# EAGLE board Led_Driver_180_LEDs_rev_1 (EAGLE 6.4), part 1 of 3
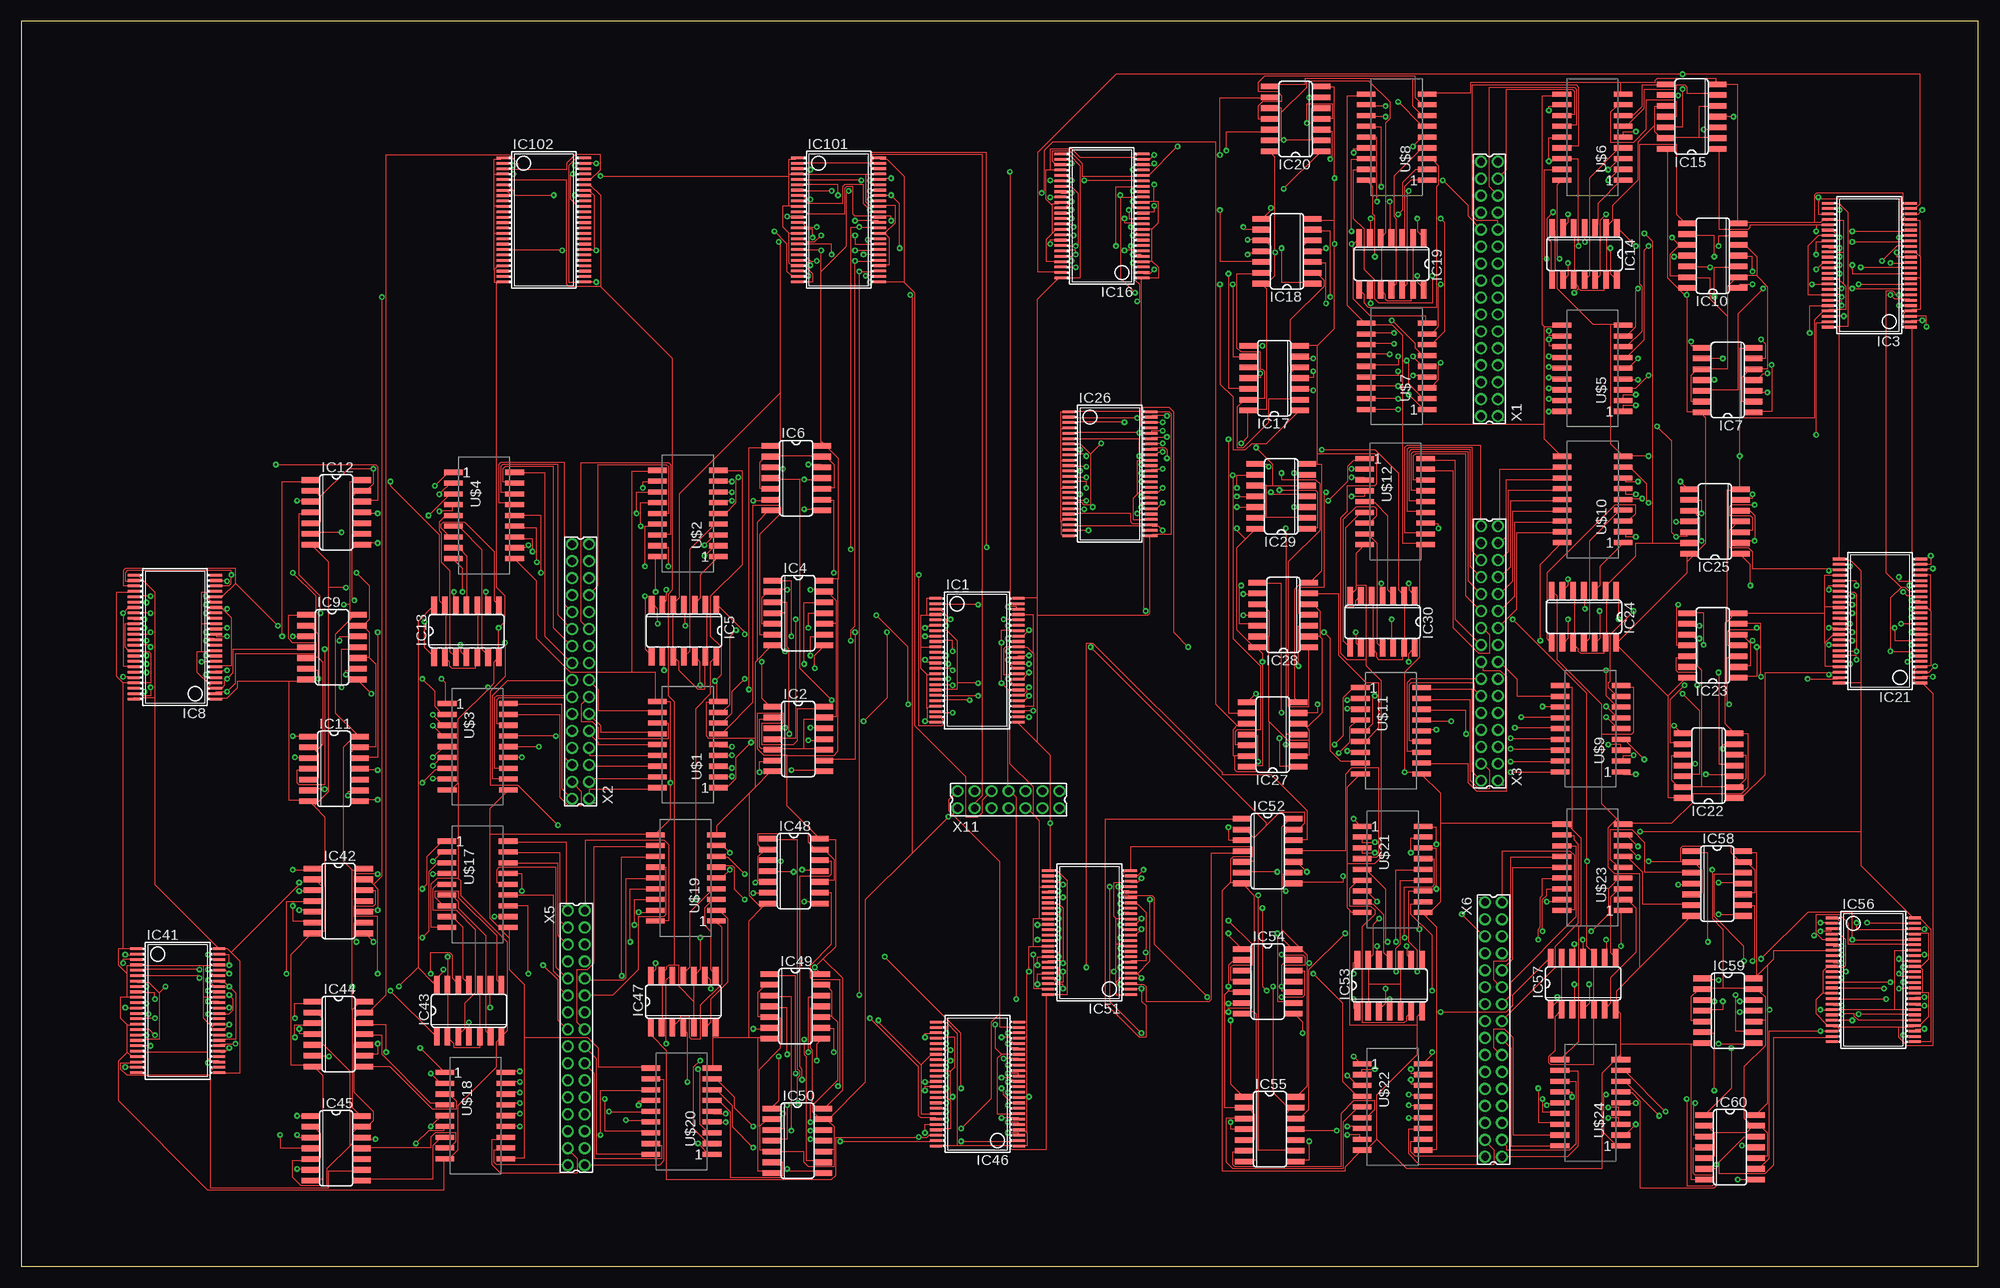
[diagram p0: board, top side]
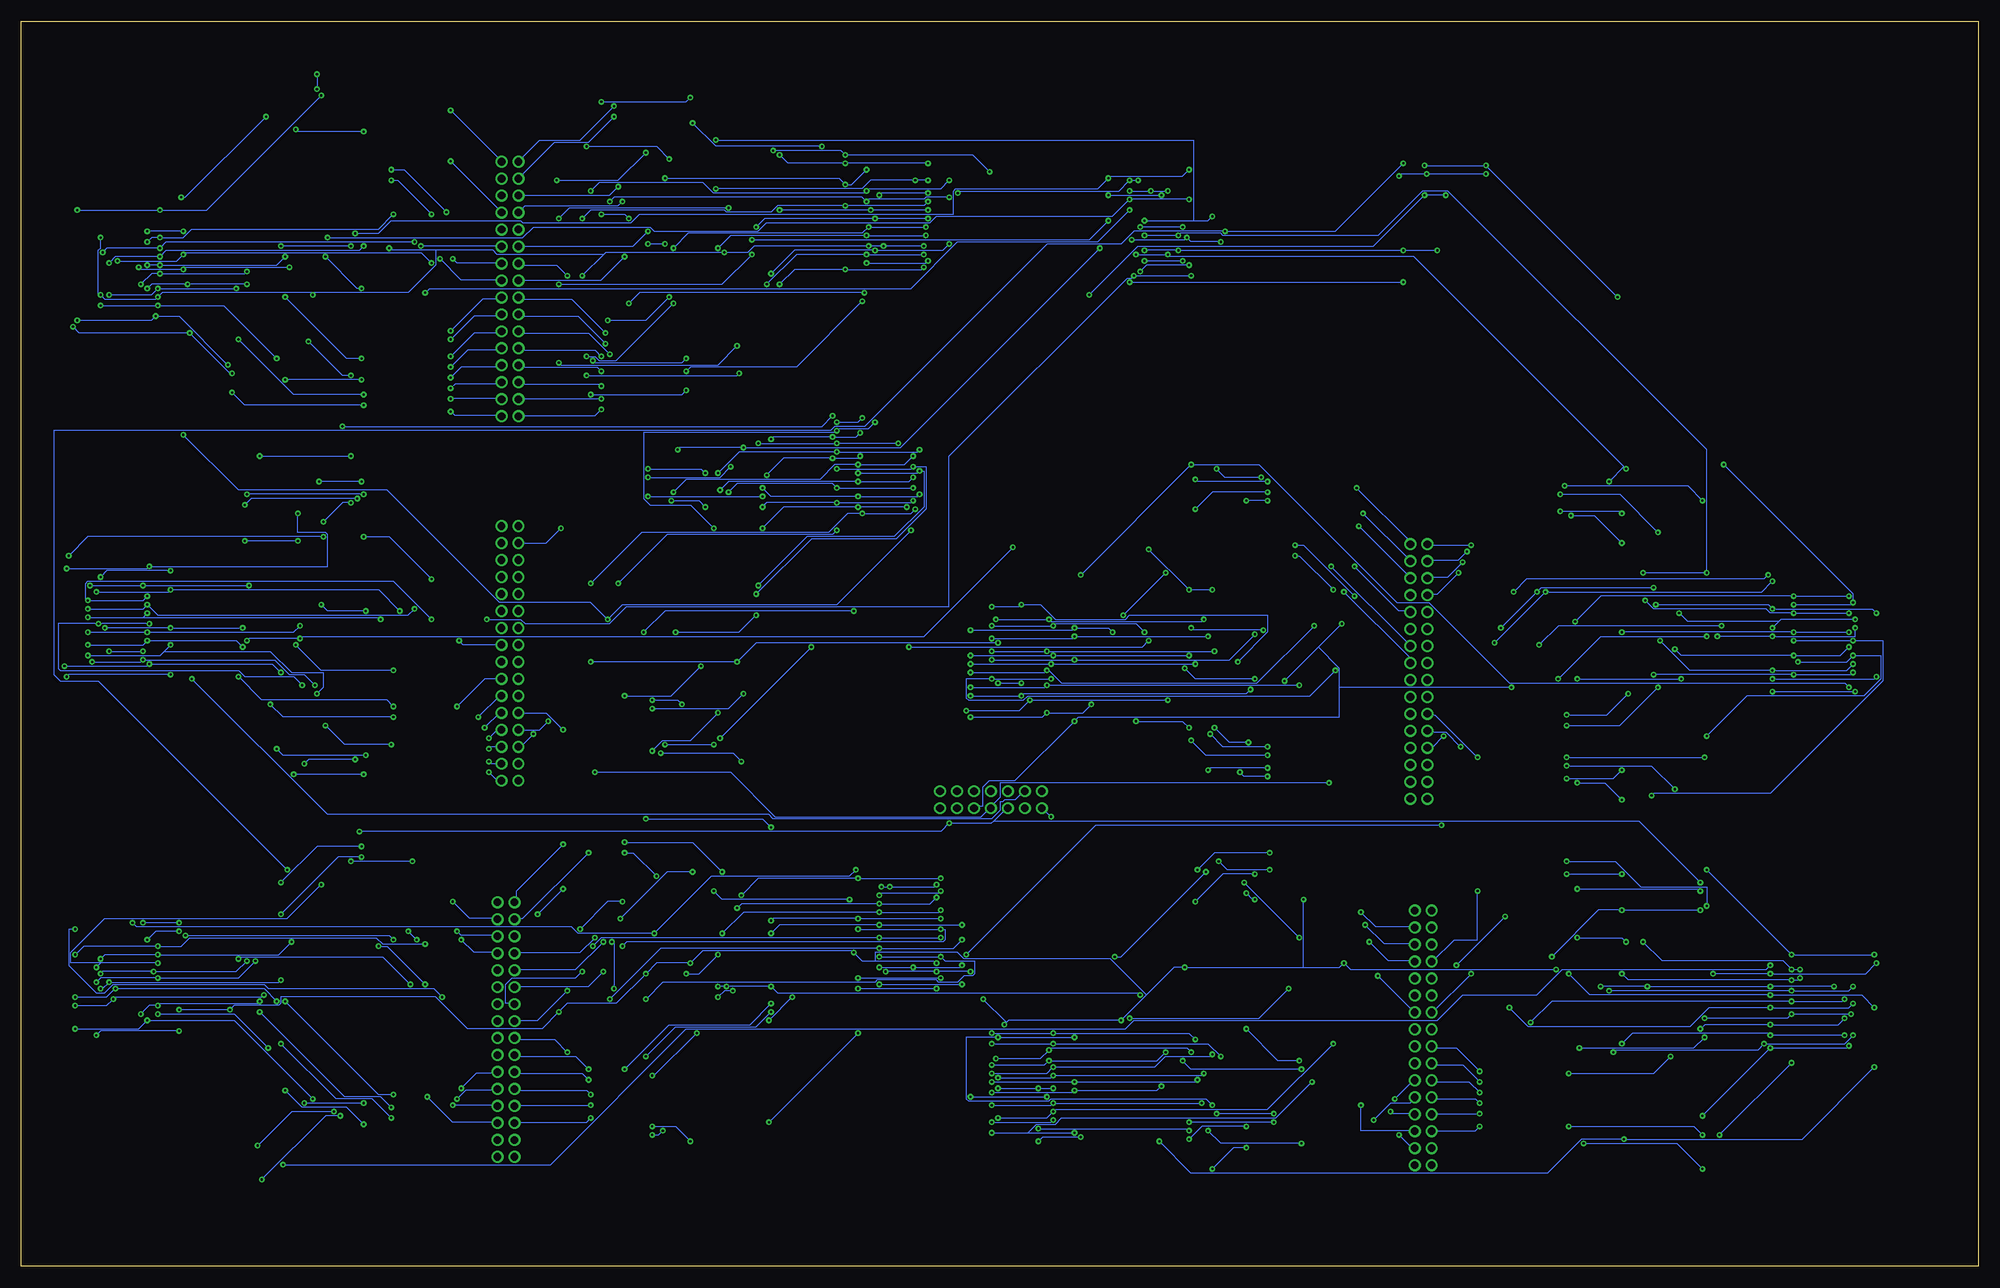
[diagram p1: board, bottom side, seen from below]

Size 230.6 x 146.75 mm. Coordinates in mm from the lower left corner, seen from the top.
Outline: 0,0 230.6,0 230.6,146.75 0,146.75 0,0
Copper layers (1*16): Top 0.035mm / dielectric 1.5mm / Bottom 0.035mm
Design rules "myRules": minimum track width 5mil, minimum drill 10mil, track to track 4mil, track to pad 4mil, pad to pad 4mil, via to via 4mil, smd to smd 4mil, copper to edge 40mil, drill to drill 5mil, minimum pad ring 10mil, minimum via ring 8mil, stop-mask expansion 4mil, vias tented up to drill 0mil, thermal gap 10mil

## Footprints (pad centres in the part's own frame; a part is rotated, then mirrored left to right if it is on the bottom)
SSOP48DL = smd 0.305 x 1.422: 1 -6.985,-4.877; 2 -6.35,-4.877; 3 -5.715,-4.877; 4 -5.08,-4.877; 5 -4.445,-4.877; 6 -3.81,-4.877; 7 -3.175,-4.877; 8 -2.54,-4.877; 9 -1.905,-4.877; 10 -1.27,-4.877; 11 -0.635,-4.877; 12 0,-4.877; 13 0.635,-4.877; 14 1.27,-4.877; 15 1.905,-4.877; 16 2.54,-4.877; 17 3.175,-4.877; 18 3.81,-4.877; 19 4.445,-4.877; 20 5.08,-4.877; 21 5.715,-4.877; 22 6.35,-4.877; 23 6.985,-4.877; 24 7.62,-4.877; 25 7.62,4.877; 26 6.985,4.877; 27 6.35,4.877; 28 5.715,4.877; 29 5.08,4.877; 30 4.445,4.877; 31 3.81,4.877; 32 3.175,4.877; 33 2.54,4.877; 34 1.905,4.877; 35 1.27,4.877; 36 0.635,4.877; 37 0,4.877; 38 -0.635,4.877; 39 -1.27,4.877; 40 -1.905,4.877; 41 -2.54,4.877; 42 -3.175,4.877; 43 -3.81,4.877; 44 -4.445,4.877; 45 -5.08,4.877; 46 -5.715,4.877; 47 -6.35,4.877; 48 -6.985,4.877
SO14 = smd 0.66 x 2.032: 1 -3.81,-3.073; 2 -2.54,-3.073; 3 -1.27,-3.073; 4 0,-3.073; 5 1.27,-3.073; 6 2.54,-3.073; 7 3.81,-3.073; 8 3.81,3.073; 9 2.54,3.073; 10 1.27,3.073; 11 0,3.073; 12 -1.27,3.073; 13 -2.54,3.073; 14 -3.81,3.073
SOP-18 = smd 0.6 x 2.2: 1 -5.08,-3.6; 2 -3.81,-3.6; 3 -2.54,-3.6; 4 -1.27,-3.6; 5 0,-3.6; 6 1.27,-3.6; 7 2.54,-3.6; 8 3.81,-3.6; 9 5.08,-3.6; 10 5.08,3.6; 11 3.81,3.6; 12 2.54,3.6; 13 1.27,3.6; 14 0,3.6; 15 -1.27,3.6; 16 -2.54,3.6; 17 -3.81,3.6; 18 -5.08,3.6
87758-3216 = drill 0.9 pad 1.27: 1 -15,-1; 2 -15,1; 3 -13,-1; 4 -13,1; 5 -11,-1; 6 -11,1; 7 -9,-1; 8 -9,1; 9 -7,-1; 10 -7,1; 11 -5,-1; 12 -5,1; 13 -3,-1; 14 -3,1; 15 -1,-1; 16 -1,1; 17 1,-1; 18 1,1; 19 3,-1; 20 3,1; 21 5,-1; 22 5,1; 23 7,-1; 24 7,1; 25 9,-1; 26 9,1; 27 11,-1; 28 11,1; 29 13,-1; 30 13,1; 31 15,-1; 32 15,1
87758-1416 = drill 0.9 pad 1.27: 1 -6,-1; 2 -6,1; 3 -4,-1; 4 -4,1; 5 -2,-1; 6 -2,1; 7 0,-1; 8 0,1; 9 2,-1; 10 2,1; 11 4,-1; 12 4,1; 13 6,-1; 14 6,1

## Placement (x,y rotation side)
IC1  74AC16374  [SSOP48DL]  112.62,71.75 270 top
IC2  74S08D  [SO14]  91.56,62.16 270 top
IC3  74AC16374  [SSOP48DL]  217.75,117.68 90 top
IC4  74S08D  [SO14]  91.56,77 270 top
IC5  74S08D  [SO14]  78.09,74.94 180 top
IC6  74S08D  [SO14]  91.31,92.91 270 top
IC7  74S08D  [SO14]  201.07,104.46 90 top
IC8  74AC16374  [SSOP48DL]  18.12,73.85 90 top
IC9  74S08D  [SO14]  36.62,72.98 270 top
IC10  74S08D  [SO14]  199.32,119.12 90 top
IC11  74S08D  [SO14]  36.87,58.64 270 top
IC12  74S08D  [SO14]  37.12,88.87 270 top
IC13  74S08D  [SO14]  52.47,74.87 0 top
IC14  74S08D  [SO14]  184.2,119.32 180 top
IC15  74S08D  [SO14]  196.82,135.5 90 top
IC16  74AC16374  [SSOP48DL]  127.33,123.49 90 top
IC17  74S08D  [SO14]  147.66,104.69 90 top
IC18  74S08D  [SO14]  149.14,119.64 90 top
IC19  74S08D  [SO14]  161.45,118.16 180 top
IC20  74S08D  [SO14]  150.16,135.23 90 top
IC21  74AC16374  [SSOP48DL]  219.02,75.75 90 top
IC22  74S08D  [SO14]  198.82,59.03 90 top
IC23  74S08D  [SO14]  199.32,73.19 90 top
IC24  74S08D  [SO14]  184.13,76.57 180 top
IC25  74S08D  [SO14]  199.57,87.8 90 top
IC26  74AC16374  [SSOP48DL]  128.27,93.75 270 top
IC27  74S08D  [SO14]  147.47,62.69 90 top
IC28  74S08D  [SO14]  148.72,76.78 90 top
IC29  74S08D  [SO14]  148.47,90.76 90 top
IC30  74S08D  [SO14]  160.4,75.97 180 top
IC41  74AC16374  [SSOP48DL]  18.43,30.46 270 top
IC42  74S08D  [SO14]  37.39,43.07 270 top
IC43  74S08D  [SO14]  52.77,30.14 0 top
IC44  74S08D  [SO14]  37.39,27.39 270 top
IC45  74S08D  [SO14]  37.11,13.93 270 top
IC46  74AC16374  [SSOP48DL]  112.68,21.19 90 top
IC47  74S08D  [SO14]  78,31.21 0 top
IC48  74S08D  [SO14]  91.04,46.59 270 top
IC49  74S08D  [SO14]  91.21,30.66 270 top
IC50  74S08D  [SO14]  91.46,14.82 270 top
IC51  74AC16374  [SSOP48DL]  125.87,39.04 90 top
IC52  74S08D  [SO14]  146.87,48.95 270 top
IC53  74S08D  [SO14]  161.25,33.12 0 top
IC54  74S08D  [SO14]  146.87,33.59 270 top
IC55  74S08D  [SO14]  147.12,16.18 270 top
IC56  74AC16374  [SSOP48DL]  218.23,34.1 270 top
IC57  74S08D  [SO14]  184.04,33.34 0 top
IC58  74S08D  [SO14]  199.84,45.12 270 top
IC59  74S08D  [SO14]  201.09,30.14 270 top
IC60  74S08D  [SO14]  201.34,14.05 270 top
IC101  74AC16374  [SSOP48DL]  96.32,123.66 270 top
IC102  74AC16374  [SSOP48DL]  61.58,123.65 270 top
U$1  ULN2804-SM  [SOP-18]  78.55,61.5 90 top
U$2  ULN2804-SM  [SOP-18]  78.55,88.74 90 top
U$3  ULN2804-SM  [SOP-18]  53.79,61.25 270 top
U$4  ULN2804-SM  [SOP-18]  54.54,88.51 270 top
U$5  ULN2804-SM  [SOP-18]  185.14,105.85 90 top
U$6  ULN2804-SM  [SOP-18]  185.14,133.09 90 top
U$7  ULN2804-SM  [SOP-18]  162.07,106.08 90 top
U$8  ULN2804-SM  [SOP-18]  162.07,133.09 90 top
U$9  ULN2804-SM  [SOP-18]  184.91,63.38 90 top
U$10  ULN2804-SM  [SOP-18]  185.16,90.39 90 top
U$11  ULN2804-SM  [SOP-18]  161.4,63.13 270 top
U$12  ULN2804-SM  [SOP-18]  161.9,90.14 270 top
U$17  ULN2804-SM  [SOP-18]  53.77,45.04 270 top
U$18  ULN2804-SM  [SOP-18]  53.52,17.78 270 top
U$19  ULN2804-SM  [SOP-18]  78.3,45.79 90 top
U$20  ULN2804-SM  [SOP-18]  77.8,18.3 90 top
U$21  ULN2804-SM  [SOP-18]  161.59,46.79 270 top
U$22  ULN2804-SM  [SOP-18]  161.59,18.8 270 top
U$23  ULN2804-SM  [SOP-18]  185.14,47.04 90 top
U$24  ULN2804-SM  [SOP-18]  184.89,19.3 90 top
X1  87758-3216  [87758-3216]  173,115.2 90 top
X2  87758-3216  [87758-3216]  65.91,70.12 90 top
X3  87758-3216  [87758-3216]  173.02,72.25 90 top
X5  87758-3216  [87758-3216]  65.41,26.94 270 top
X6  87758-3216  [87758-3216]  173.48,27.92 270 top
X11  87758-1416  [87758-1416]  116.34,55.01 0 top

## Library data of the parts
IC1 IC3 IC8 IC16 IC21 IC26 IC41 IC46 IC51 IC56 IC101 IC102 = 74ac-logic
IC2 IC4-IC7 IC9-IC15 IC17-IC20 IC22-IC25 IC27-IC30 IC42-IC45 IC47-IC50 IC52-IC55 IC57-IC60 = 74xx-us
U$1-U$12 U$17-U$24 = fairchild-semic
X1-X3 X5 X6 = con-molex; MPN: 87758-3216; OC_FARNELL: unknown; OC_NEWARK: 25M5684
X11 = con-molex; MF: MOLEX; MPN: 87758-1416; OC_FARNELL: 7472358; OC_NEWARK: 59J1562

## Nets
GND: IC1.1 IC1.4 IC1.10 IC1.15 IC1.21 IC1.24 IC1.28 IC1.34 IC1.39 IC1.45 IC2.7 IC3.1 IC3.4 IC3.10 IC3.15 IC3.21 IC3.24 IC3.28 IC3.34 IC3.39 IC3.45 IC4.7 IC5.7 IC6.7 IC7.7 IC8.1 IC8.4 IC8.10 IC8.15 IC8.21 IC8.24 IC8.28 IC8.34 IC8.39 IC8.45 IC9.7 IC10.7 IC11.7 IC12.7 IC13.7 IC14.7 IC15.7 IC16.1 IC16.4 IC16.10 IC16.15 IC16.21 IC16.24 IC16.28 IC16.34 IC16.39 IC16.45 IC17.7 IC18.7 IC19.7 IC20.7 IC21.1 IC21.4 IC21.10 IC21.15 IC21.21 IC21.24 IC21.28 IC21.34 IC21.39 IC21.45 IC22.7 IC23.7 IC24.7 IC25.7 IC26.1 IC26.4 IC26.10 IC26.15 IC26.21 IC26.24 IC26.28 IC26.34 IC26.39 IC26.45 IC27.7 IC28.7 IC29.7 IC30.7 IC41.1 IC41.4 IC41.10 IC41.15 IC41.21 IC41.24 IC41.28 IC41.34 IC41.39 IC41.45 IC42.7 IC43.7 IC44.7 IC45.7 IC46.1 IC46.4 IC46.10 IC46.15 IC46.21 IC46.24 IC46.28 IC46.34 IC46.39 IC46.45 IC47.7 IC48.7 IC49.7 IC50.7 IC51.1 IC51.4 IC51.10 IC51.15 IC51.21 IC51.24 IC51.28 IC51.34 IC51.39 IC51.45 IC52.7 IC53.7 IC54.7 IC55.7 IC56.1 IC56.4 IC56.10 IC56.15 IC56.21 IC56.24 IC56.28 IC56.34 IC56.39 IC56.45 IC57.7 IC58.7 IC59.7 IC60.7 IC101.1 IC101.4 IC101.10 IC101.15 IC101.21 IC101.24 IC101.28 IC101.34 IC101.39 IC101.45 IC102.1 IC102.4 IC102.10 IC102.15 IC102.21 IC102.24 IC102.28 IC102.34 IC102.39 IC102.45 U$1.9 U$2.9 U$3.9 U$4.9 U$5.9 U$6.9 U$7.9 U$8.9 U$9.9 U$10.9 U$11.9 U$12.9 U$17.9 U$18.9 U$19.9 U$20.9 U$21.9 U$22.9 U$23.9 U$24.9 X11.9
N$1: IC46.23 IC50.12 X11.2
N$2: IC1.2 IC1.46 IC2.1
N$3: IC1.3 IC1.44 IC2.4
N$4: IC1.5 IC1.43 IC2.9
N$5: IC1.6 IC1.41 IC2.12
N$6: IC1.8 IC1.40 IC4.1
N$7: IC1.9 IC1.38 IC4.4
N$8: IC1.11 IC1.37 IC4.9
N$9: IC1.12 IC1.36 IC4.12
N$10: IC1.13 IC1.35 IC5.1
N$11: IC1.14 IC1.33 IC5.4
N$12: IC1.16 IC1.32 IC5.9
N$13: IC1.17 IC1.30 IC5.12
N$14: IC1.19 IC1.29 IC6.1
N$15: IC1.20 IC1.27 IC6.4
N$16: IC1.22 IC1.26 IC6.9
N$17: U$1.18 X2.1
N$19: IC2.3 U$1.1
N$20: IC2.6 U$1.2
N$21: IC2.8 U$1.3
N$22: IC2.11 U$1.4
N$23: IC4.3 U$1.5
N$24: IC4.11 U$1.8
N$25: IC4.8 U$1.7
N$26: IC4.6 U$1.6
N$27: IC5.3 U$2.1
N$28: IC5.6 U$2.2
N$29: IC5.8 U$2.3
N$30: IC6.11 U$2.8
N$31: IC6.8 U$2.7
N$32: IC6.6 U$2.6
N$33: IC6.3 U$2.5
N$34: IC5.11 U$2.4
N$35: IC22.2 IC22.5 IC22.10 IC22.13 IC23.2 IC23.5 IC23.10 IC23.13 IC101.2 IC101.46
N$36: IC24.2 IC24.5 IC24.10 IC24.13 IC25.2 IC25.5 IC25.10 IC25.13 IC101.3 IC101.44
N$39: IC8.2 IC8.46 IC9.1
N$40: IC8.3 IC8.44 IC9.4
N$41: IC8.5 IC8.43 IC9.9
N$42: IC8.6 IC8.41 IC9.12
N$43: IC8.8 IC8.40 IC11.1
N$44: IC8.9 IC8.38 IC11.4
N$45: IC8.11 IC8.37 IC11.9
N$46: IC8.12 IC8.36 IC11.12
N$47: IC8.13 IC8.35 IC12.1
N$48: IC8.14 IC8.33 IC12.4
N$49: IC8.16 IC8.32 IC12.9
N$50: IC8.17 IC8.30 IC12.12
N$51: IC8.19 IC8.29 IC13.1
N$52: IC8.20 IC8.27 IC13.4
N$53: IC8.22 IC8.26 IC13.9
N$54: IC8.23 IC13.12 IC51.47
N$56: IC9.3 U$3.1
N$57: IC9.6 U$3.2
N$58: IC9.8 U$3.3
N$59: IC9.11 U$3.4
N$60: IC11.3 U$3.5
N$61: IC11.11 U$3.8
N$62: IC11.8 U$3.7
N$63: IC11.6 U$3.6
N$64: IC12.3 U$4.1
N$65: IC12.6 U$4.2
N$66: IC12.8 U$4.3
N$67: IC13.11 U$4.8
N$68: IC13.8 U$4.7
N$69: IC13.6 U$4.6
N$70: IC13.3 U$4.5
N$71: IC12.11 U$4.4
N$72: IC1.23 IC6.12 IC8.47
N$75: U$1.17 X2.3
N$76: U$1.16 X2.5
N$77: U$1.15 X2.7
N$78: U$1.14 X2.9
N$79: U$1.13 X2.11
N$80: U$1.12 X2.13
N$81: U$1.11 X2.15
N$82: U$2.18 X2.17
N$83: U$2.17 X2.19
N$84: U$2.16 X2.21
N$85: U$2.15 X2.23
N$86: U$2.14 X2.25
N$87: U$2.13 X2.27
N$88: U$2.12 X2.29
N$89: U$2.11 X2.31
N$90: U$4.11 X2.32
N$91: U$4.12 X2.30
N$92: U$4.13 X2.28
N$93: U$4.14 X2.26
N$94: U$4.15 X2.24
N$95: U$4.16 X2.22
N$96: U$4.17 X2.20
N$97: U$4.18 X2.18
N$98: U$3.11 X2.16
N$99: U$3.12 X2.14
N$100: U$3.13 X2.12
N$101: U$3.14 X2.10
N$102: U$3.15 X2.8
N$103: U$3.16 X2.6
N$104: U$3.17 X2.4
N$105: U$3.18 X2.2
N$107: IC3.2 IC3.46 IC7.1
N$108: IC3.3 IC3.44 IC7.4
N$109: IC3.5 IC3.43 IC7.9
N$110: IC3.6 IC3.41 IC7.12
N$111: IC3.8 IC3.40 IC10.1
N$112: IC3.9 IC3.38 IC10.4
N$113: IC3.11 IC3.37 IC10.9
N$114: IC3.12 IC3.36 IC10.12
N$115: IC3.13 IC3.35 IC14.1
N$116: IC3.14 IC3.33 IC14.4
N$117: IC3.16 IC3.32 IC14.9
N$118: IC3.17 IC3.30 IC14.12
N$119: IC3.19 IC3.29 IC15.1
N$120: IC3.20 IC3.27 IC15.4
N$121: IC3.22 IC3.26 IC15.9
N$123: IC7.3 U$5.1
N$124: IC7.6 U$5.2
N$125: IC7.8 U$5.3
N$126: IC7.11 U$5.4
N$127: IC10.3 U$5.5
N$128: IC10.11 U$5.8
N$129: IC10.8 U$5.7
N$130: IC10.6 U$5.6
N$131: IC14.3 U$6.1
N$132: IC14.6 U$6.2
N$133: IC14.8 U$6.3
N$134: IC15.11 U$6.8
N$135: IC15.8 U$6.7
N$136: IC15.6 U$6.6
N$137: IC15.3 U$6.5
N$138: IC14.11 U$6.4
N$143: IC16.2 IC16.46 IC17.1
N$144: IC16.3 IC16.44 IC17.4
N$145: IC16.5 IC16.43 IC17.9
N$146: IC16.6 IC16.41 IC17.12
N$147: IC16.8 IC16.40 IC18.1
N$148: IC16.9 IC16.38 IC18.4
N$149: IC16.11 IC16.37 IC18.9
N$150: IC16.12 IC16.36 IC18.12
N$151: IC16.13 IC16.35 IC19.1
N$152: IC16.14 IC16.33 IC19.4
N$153: IC16.16 IC16.32 IC19.9
N$154: IC16.17 IC16.30 IC19.12
N$155: IC16.19 IC16.29 IC20.1
N$156: IC16.20 IC16.27 IC20.4
N$157: IC16.22 IC16.26 IC20.9
N$158: IC1.47 IC16.23 IC20.12
N$160: IC17.3 U$7.1
N$161: IC17.6 U$7.2
N$162: IC17.8 U$7.3
N$163: IC17.11 U$7.4
N$164: IC18.3 U$7.5
N$165: IC18.11 U$7.8
N$166: IC18.8 U$7.7
N$167: IC18.6 U$7.6
N$168: IC19.3 U$8.1
N$169: IC19.6 U$8.2
N$170: IC19.8 U$8.3
N$171: IC20.11 U$8.8
N$172: IC20.8 U$8.7
N$173: IC20.6 U$8.6
N$174: IC20.3 U$8.5
N$175: IC19.11 U$8.4
N$176: IC3.23 IC15.12 IC16.47
N$179: U$5.18 X1.1
N$180: U$5.17 X1.3
N$181: U$5.16 X1.5
N$182: U$5.15 X1.7
N$183: U$5.14 X1.9
N$184: U$5.13 X1.11
N$185: U$5.12 X1.13
N$186: U$5.11 X1.15
N$187: U$6.18 X1.17
N$188: U$6.17 X1.19
N$189: U$6.16 X1.21
N$190: U$6.15 X1.23
N$191: U$6.14 X1.25
N$192: U$6.13 X1.27
N$193: U$6.12 X1.29
N$194: U$6.11 X1.31
N$195: U$8.11 X1.32
N$196: U$8.12 X1.30
N$197: U$8.13 X1.28
N$198: U$8.14 X1.26
N$199: U$8.15 X1.24
N$200: U$8.16 X1.22
N$201: U$8.17 X1.20
N$202: U$8.18 X1.18
N$203: U$7.11 X1.16
N$204: U$7.12 X1.14
N$205: U$7.13 X1.12
N$206: U$7.14 X1.10
N$207: U$7.15 X1.8
N$208: U$7.16 X1.6
N$209: U$7.17 X1.4
N$210: U$7.18 X1.2
N$212: IC21.2 IC21.46 IC22.1
N$213: IC21.3 IC21.44 IC22.4
N$214: IC21.5 IC21.43 IC22.9
N$215: IC21.6 IC21.41 IC22.12
N$216: IC21.8 IC21.40 IC23.1
N$217: IC21.9 IC21.38 IC23.4
N$218: IC21.11 IC21.37 IC23.9
N$219: IC21.12 IC21.36 IC23.12
N$220: IC21.13 IC21.35 IC24.1
N$221: IC21.14 IC21.33 IC24.4
N$222: IC21.16 IC21.32 IC24.9
N$223: IC21.17 IC21.30 IC24.12
N$224: IC21.19 IC21.29 IC25.1
N$225: IC21.20 IC21.27 IC25.4
N$226: IC21.22 IC21.26 IC25.9
N$228: IC22.3 U$9.1
N$229: IC22.6 U$9.2
N$230: IC22.8 U$9.3
N$231: IC22.11 U$9.4
N$232: IC23.3 U$9.5
N$233: IC23.11 U$9.8
N$234: IC23.8 U$9.7
N$235: IC23.6 U$9.6
N$236: IC24.3 U$10.1
N$237: IC24.6 U$10.2
N$238: IC24.8 U$10.3
N$239: IC25.11 U$10.8
N$240: IC25.8 U$10.7
N$241: IC25.6 U$10.6
N$242: IC25.3 U$10.5
N$243: IC24.11 U$10.4
N$244: IC21.47 X11.4
N$248: IC26.2 IC26.46 IC27.1
N$249: IC26.3 IC26.44 IC27.4
N$250: IC26.5 IC26.43 IC27.9
N$251: IC26.6 IC26.41 IC27.12
N$252: IC26.8 IC26.40 IC28.1
N$253: IC26.9 IC26.38 IC28.4
N$254: IC26.11 IC26.37 IC28.9
N$255: IC26.12 IC26.36 IC28.12
N$256: IC26.13 IC26.35 IC29.1
N$257: IC26.14 IC26.33 IC29.4
N$258: IC26.16 IC26.32 IC29.9
N$259: IC26.17 IC26.30 IC29.12
N$260: IC26.19 IC26.29 IC30.1
N$261: IC26.20 IC26.27 IC30.4
N$262: IC26.22 IC26.26 IC30.9
N$263: IC3.47 IC26.23 IC30.12
N$265: IC27.3 U$11.1
N$266: IC27.6 U$11.2
N$267: IC27.8 U$11.3
N$268: IC27.11 U$11.4
N$269: IC28.3 U$11.5
N$270: IC28.11 U$11.8
N$271: IC28.8 U$11.7
N$272: IC28.6 U$11.6
N$273: IC29.3 U$12.1
N$274: IC29.6 U$12.2
N$275: IC29.8 U$12.3
N$276: IC30.11 U$12.8
N$277: IC30.8 U$12.7
N$278: IC30.6 U$12.6
N$279: IC30.3 U$12.5
N$280: IC29.11 U$12.4
N$281: IC21.23 IC25.12 IC26.47
N$284: U$9.18 X3.1
N$285: U$9.17 X3.3
N$286: U$9.16 X3.5
N$287: U$9.15 X3.7
N$288: U$9.14 X3.9
N$289: U$9.13 X3.11
N$290: U$9.12 X3.13
N$291: U$9.11 X3.15
N$292: U$10.18 X3.17
N$293: U$10.17 X3.19
N$294: U$10.16 X3.21
N$295: U$10.15 X3.23
N$296: U$10.14 X3.25
N$297: U$10.13 X3.27
N$298: U$10.12 X3.29
N$299: U$10.11 X3.31
N$300: U$12.11 X3.32
N$301: U$12.12 X3.30
N$302: U$12.13 X3.28
N$303: U$12.14 X3.26
N$304: U$12.15 X3.24
N$305: U$12.16 X3.22
N$306: U$12.17 X3.20
N$307: U$12.18 X3.18
N$308: U$11.11 X3.16
N$309: U$11.12 X3.14
N$310: U$11.13 X3.12
N$311: U$11.14 X3.10
N$312: U$11.15 X3.8
N$313: U$11.16 X3.6
N$314: U$11.17 X3.4
N$315: U$11.18 X3.2
N$422: IC41.2 IC41.46 IC42.1
N$423: IC41.3 IC41.44 IC42.4
N$424: IC41.5 IC41.43 IC42.9
N$425: IC41.6 IC41.41 IC42.12
N$426: IC41.8 IC41.40 IC43.1
N$427: IC41.9 IC41.38 IC43.4
N$428: IC41.11 IC41.37 IC43.9
N$429: IC41.12 IC41.36 IC43.12
N$430: IC41.13 IC41.35 IC44.1
N$431: IC41.14 IC41.33 IC44.4
N$432: IC41.16 IC41.32 IC44.9
N$433: IC41.17 IC41.30 IC44.12
N$434: IC41.19 IC41.29 IC45.1
N$435: IC41.20 IC41.27 IC45.4
N$436: IC41.22 IC41.26 IC45.9
N$438: IC42.3 U$17.1
N$439: IC42.6 U$17.2
N$440: IC42.8 U$17.3
N$441: IC42.11 U$17.4
N$442: IC43.3 U$17.5
N$443: IC43.11 U$17.8
N$444: IC43.8 U$17.7
N$445: IC43.6 U$17.6
N$446: IC44.3 U$18.1
N$447: IC44.6 U$18.2
N$448: IC44.8 U$18.3
N$449: IC45.11 U$18.8
N$450: IC45.8 U$18.7
N$451: IC45.6 U$18.6
N$452: IC45.3 U$18.5
N$453: IC44.11 U$18.4
N$458: IC46.2 IC46.46 IC47.1
N$459: IC46.3 IC46.44 IC47.4
N$460: IC46.5 IC46.43 IC47.9
N$461: IC46.6 IC46.41 IC47.12
N$462: IC46.8 IC46.40 IC48.1
N$463: IC46.9 IC46.38 IC48.4
N$464: IC46.11 IC46.37 IC48.9
N$465: IC46.12 IC46.36 IC48.12
N$466: IC46.13 IC46.35 IC49.1
N$467: IC46.14 IC46.33 IC49.4
N$468: IC46.16 IC46.32 IC49.9
N$469: IC46.17 IC46.30 IC49.12
N$470: IC46.19 IC46.29 IC50.1
N$471: IC46.20 IC46.27 IC50.4
N$472: IC46.22 IC46.26 IC50.9
N$475: IC47.3 U$19.1
N$476: IC47.6 U$19.2
N$477: IC47.8 U$19.3
N$478: IC47.11 U$19.4
N$479: IC48.3 U$19.5
N$480: IC48.11 U$19.8
N$481: IC48.8 U$19.7
N$482: IC48.6 U$19.6
N$483: IC49.3 U$20.1
N$484: IC49.6 U$20.2
N$485: IC49.8 U$20.3
N$486: IC50.11 U$20.8
N$487: IC50.8 U$20.7
N$488: IC50.6 U$20.6
N$489: IC50.3 U$20.5
N$490: IC49.11 U$20.4
N$491: IC41.23 IC45.12 IC46.47
N$494: U$17.18 X5.1
N$495: U$17.17 X5.3
N$496: U$17.16 X5.5
N$497: U$17.15 X5.7
N$498: U$17.14 X5.9
N$499: U$17.13 X5.11
N$500: U$17.12 X5.13
N$501: U$17.11 X5.15
N$502: U$18.18 X5.17
N$503: U$18.17 X5.19
N$504: U$18.16 X5.21
N$505: U$18.15 X5.23
N$506: U$18.14 X5.25
N$507: U$18.13 X5.27
N$508: U$18.12 X5.29
N$509: U$18.11 X5.31
N$510: U$20.11 X5.32
N$511: U$20.12 X5.30
N$512: U$20.13 X5.28
N$513: U$20.14 X5.26
N$514: U$20.15 X5.24
N$515: U$20.16 X5.22
N$516: U$20.17 X5.20
N$517: U$20.18 X5.18
N$518: U$19.11 X5.16
N$519: U$19.12 X5.14
N$520: U$19.13 X5.12
N$521: U$19.14 X5.10
N$522: U$19.15 X5.8
N$523: U$19.16 X5.6
N$524: U$19.17 X5.4
N$525: U$19.18 X5.2
N$527: IC51.2 IC51.46 IC52.1
N$528: IC51.3 IC51.44 IC52.4
N$529: IC51.5 IC51.43 IC52.9
N$530: IC51.6 IC51.41 IC52.12
N$531: IC51.8 IC51.40 IC53.1
N$532: IC51.9 IC51.38 IC53.4
N$533: IC51.11 IC51.37 IC53.9
N$534: IC51.12 IC51.36 IC53.12
N$535: IC51.13 IC51.35 IC54.1
N$536: IC51.14 IC51.33 IC54.4
N$537: IC51.16 IC51.32 IC54.9
N$538: IC51.17 IC51.30 IC54.12
N$539: IC51.19 IC51.29 IC55.1
N$540: IC51.20 IC51.27 IC55.4
N$541: IC51.22 IC51.26 IC55.9
N$543: IC52.3 U$21.1
N$544: IC52.6 U$21.2
N$545: IC52.8 U$21.3
N$546: IC52.11 U$21.4
N$547: IC53.3 U$21.5
N$548: IC53.11 U$21.8
N$549: IC53.8 U$21.7
N$550: IC53.6 U$21.6
N$551: IC54.3 U$22.1
N$552: IC54.6 U$22.2
N$553: IC54.8 U$22.3
N$554: IC55.11 U$22.8
N$555: IC55.8 U$22.7
N$556: IC55.6 U$22.6
N$557: IC55.3 U$22.5
N$558: IC54.11 U$22.4
N$563: IC56.2 IC56.46 IC57.1
N$564: IC56.3 IC56.44 IC57.4
N$565: IC56.5 IC56.43 IC57.9
N$566: IC56.6 IC56.41 IC57.12
N$567: IC56.8 IC56.40 IC58.1
N$568: IC56.9 IC56.38 IC58.4
N$569: IC56.11 IC56.37 IC58.9
N$570: IC56.12 IC56.36 IC58.12
N$571: IC56.13 IC56.35 IC59.1
N$572: IC56.14 IC56.33 IC59.4
N$573: IC56.16 IC56.32 IC59.9
N$574: IC56.17 IC56.30 IC59.12
N$575: IC56.19 IC56.29 IC60.1
N$576: IC56.20 IC56.27 IC60.4
N$577: IC56.22 IC56.26 IC60.9
N$578: IC41.47 IC56.23 IC60.12
N$580: IC57.3 U$23.1
N$581: IC57.6 U$23.2
N$582: IC57.8 U$23.3
N$583: IC57.11 U$23.4
N$584: IC58.3 U$23.5
N$585: IC58.11 U$23.8
N$586: IC58.8 U$23.7
N$587: IC58.6 U$23.6
N$588: IC59.3 U$24.1
N$589: IC59.6 U$24.2
N$590: IC59.8 U$24.3
N$591: IC60.11 U$24.8
N$592: IC60.8 U$24.7
N$593: IC60.6 U$24.6
N$594: IC60.3 U$24.5
N$595: IC59.11 U$24.4
N$596: IC51.23 IC55.12 IC56.47
N$599: U$21.18 X6.1
N$600: U$21.17 X6.3
N$601: U$21.16 X6.5
N$602: U$21.15 X6.7
N$603: U$21.14 X6.9
N$604: U$21.13 X6.11
N$605: U$21.12 X6.13
N$606: U$21.11 X6.15
N$607: U$22.18 X6.17
N$608: U$22.17 X6.19
N$609: U$22.16 X6.21
N$610: U$22.15 X6.23
N$611: U$22.14 X6.25
N$612: U$22.13 X6.27
N$613: U$22.12 X6.29
N$614: U$22.11 X6.31
N$615: U$24.11 X6.32
N$616: U$24.12 X6.30
N$617: U$24.13 X6.28
N$618: U$24.14 X6.26
N$619: U$24.15 X6.24
N$620: U$24.16 X6.22
N$621: U$24.17 X6.20
N$622: U$24.18 X6.18
N$623: U$23.11 X6.16
N$624: U$23.12 X6.14
N$625: U$23.13 X6.12
N$626: U$23.14 X6.10
N$627: U$23.15 X6.8
N$628: U$23.16 X6.6
N$629: U$23.17 X6.4
N$630: U$23.18 X6.2
N$938: IC27.2 IC27.5 IC27.10 IC27.13 IC28.2 IC28.5 IC28.10 IC28.13 IC101.5 IC101.43
N$1006: IC29.2 IC29.5 IC29.10 IC29.13 IC30.2 IC30.5 IC30.10 IC30.13 IC101.6 IC101.41
N$1008: IC7.2 IC7.5 IC7.10 IC7.13 IC10.2 IC10.5 IC10.10 IC10.13 IC101.8 IC101.40
N$1009: IC14.2 IC14.5 IC14.10 IC14.13 IC15.2 IC15.5 IC15.10 IC15.13 IC101.9 IC101.38
N$1010: IC17.2 IC17.5 IC17.10 IC17.13 IC18.2 IC18.5 IC18.10 IC18.13 IC101.11 IC101.37
N$1011: IC19.2 IC19.5 IC19.10 IC19.13 IC20.2 IC20.5 IC20.10 IC20.13 IC101.12 IC101.36
N$1012: IC2.2 IC2.5 IC2.10 IC2.13 IC4.2 IC4.5 IC4.10 IC4.13 IC101.13 IC101.35
N$1013: IC5.2 IC5.5 IC5.10 IC5.13 IC6.2 IC6.5 IC6.10 IC6.13 IC101.14 IC101.33
N$1014: IC9.2 IC9.5 IC9.10 IC9.13 IC11.2 IC11.5 IC11.10 IC11.13 IC101.16 IC101.32
N$1015: IC12.2 IC12.5 IC12.10 IC12.13 IC13.2 IC13.5 IC13.10 IC13.13 IC101.17 IC101.30
N$1016: IC52.2 IC52.5 IC52.10 IC52.13 IC53.2 IC53.5 IC53.10 IC53.13 IC101.19 IC101.29
N$1017: IC54.2 IC54.5 IC54.10 IC54.13 IC55.2 IC55.5 IC55.10 IC55.13 IC101.20 IC101.27
N$1018: IC57.2 IC57.5 IC57.10 IC57.13 IC58.2 IC58.5 IC58.10 IC58.13 IC101.22 IC101.26
N$1019: IC59.2 IC59.5 IC59.10 IC59.13 IC60.2 IC60.5 IC60.10 IC60.13 IC101.23 IC102.47
N$1020: IC101.47 X11.3
N$1021: U$1.10 U$2.10 U$3.10 U$4.10 U$5.10 U$6.10 U$7.10 U$8.10 U$9.10 U$10.10 U$11.10 U$12.10 U$17.10 U$18.10 U$19.10 U$20.10 U$21.10 U$22.10 U$23.10 U$24.10 X11.7
N$1023: IC42.2 IC42.5 IC42.10 IC42.13 IC43.2 IC43.5 IC43.10 IC43.13 IC102.2 IC102.46
N$1024: IC44.2 IC44.5 IC44.10 IC44.13 IC45.2 IC45.5 IC45.10 IC45.13 IC102.3 IC102.44
N$1025: IC47.2 IC47.5 IC47.10 IC47.13 IC48.2 IC48.5 IC48.10 IC48.13 IC102.5 IC102.43
N$1026: IC49.2 IC49.5 IC49.10 IC49.13 IC50.2 IC50.5 IC50.10 IC50.13 IC102.6 IC102.41 X11.1
N$1060: IC101.25 IC101.48 IC102.25 IC102.48 X11.6
N$1061: IC1.25 IC1.48 IC3.25 IC3.48 IC8.25 IC8.48 IC16.25 IC16.48 IC21.25 IC21.48 IC26.25 IC26.48 IC41.25 IC41.48 IC46.25 IC46.48 IC51.25 IC51.48 IC56.25 IC56.48 X11.5
VCC: IC1.7 IC1.18 IC1.31 IC1.42 IC2.14 IC3.7 IC3.18 IC3.31 IC3.42 IC4.14 IC5.14 IC6.14 IC7.14 IC8.7 IC8.18 IC8.31 IC8.42 IC9.14 IC10.14 IC11.14 IC12.14 IC13.14 IC14.14 IC15.14 IC16.7 IC16.18 IC16.31 IC16.42 IC17.14 IC18.14 IC19.14 IC20.14 IC21.7 IC21.18 IC21.31 IC21.42 IC22.14 IC23.14 IC24.14 IC25.14 IC26.7 IC26.18 IC26.31 IC26.42 IC27.14 IC28.14 IC29.14 IC30.14 IC41.7 IC41.18 IC41.31 IC41.42 IC42.14 IC43.14 IC44.14 IC45.14 IC46.7 IC46.18 IC46.31 IC46.42 IC47.14 IC48.14 IC49.14 IC50.14 IC51.7 IC51.18 IC51.31 IC51.42 IC52.14 IC53.14 IC54.14 IC55.14 IC56.7 IC56.18 IC56.31 IC56.42 IC57.14 IC58.14 IC59.14 IC60.14 IC101.7 IC101.18 IC101.31 IC101.42 IC102.7 IC102.18 IC102.31 IC102.42 X11.8

## Tracks (layer width: path | path; a pad name or v marks a point on that pad's centre or on a via)
GND  (via drill 0.25)
  Top 0.127: 187.25,111 188.5,111 U$5.9 | 187.25,111 185.25,111 181,115.25 181,117.25 180.75,117.5 180.75,122 180.5,122.25 IC14.7 | 187.25,111 187.25,97 188.75,95.5 U$10.9 189,95.5 v191.75,95.5 | 212.5,73.5 212.5,70.75 214,70.75 IC21.45 | 212.5,73.5 213.5,74.5 214,74.5 IC21.39 | 212.5,77.75 214,77.75 IC21.34 | 212.5,73.5 212.5,77 | 212.5,77 212.5,77.75 | 212.5,77.75 212.5,81.5 214,81.5 IC21.28 | 201,76 202,77 IC23.7 212.5,77 | 201,76 200.75,75.75 200.75,64 201.75,63 IC22.7 202,62.75 203.5,62.75 203.5,56.5 202.75,55.75 197,55.75 197,54.75 194.5,52.25 188.75,52.25 U$23.9 188.5,52.25 188,52.75 | 201,76 201,91.5 202.5,91.5 IC25.7 202.5,91.75 v202.5,95.5 202.5,100 | 202.5,100 202.5,108.25 204,108.25 IC7.7 | 188.5,139.5 170.75,139.5 170.75,138.25 165.75,138.25 U$8.9 | 188.5,139.5 188.5,138.25 U$6.9 | 214.75,115.75 214,116.5 213,116.5 IC3.39 | 214.75,115.75 215,115.5 215,112.75 213,112.75 IC3.45 212.75,112.5 212.25,112.5 211.25,111.5 211.25,100 202.5,100 | 214.75,119.5 213,119.5 IC3.34 | 214.75,115.75 214.75,119.5 | 214.75,119.5 214.75,123.25 213,123.25 IC3.28 212.75,123.25 212.25,123.25 212,123 211.25,123 | 211.25,123 202.5,123 IC10.7 202.25,123 202.25,139.25 200,139.25 IC15.7 199.75,139.5 199.75,140 192.75,140 192.5,139.75 192.5,139.5 188.5,139.5 | 214.25,39.25 213.5,39.25 IC56.4 | 214.25,39.25 214.25,40.75 214,41 213.5,41 IC56.1 | 212.25,32.25 213.25,32.25 IC56.15 | 212.25,32.25 212.25,34.75 212.75,35.25 213.25,35.25 IC56.10 213.5,35.25 214.75,35.25 215,35.5 215,38.5 214.25,39.25 | 224,32.25 223.25,32.25 IC56.34 | 224,32.25 224,35 223.75,35.25 | 223.75,35.25 223.25,35.25 IC56.39 223.75,35.25
  Top 0.127: 223.75,35.25 224.75,36.25 224.75,39.25 223.25,39.25 IC56.45 | 214,28.25 214.25,28 214.25,26.5 213.5,26.5 IC56.24 | 214,28.25 213.5,28.25 IC56.21 | 214,28.25 221.25,28.25 | 221.25,28.25 223,28.25 IC56.28 223.25,28.5 223.75,28.5 224.75,29.5 224.75,32.25 224,32.25 | 214,28.25 IC56.21 | 212.25,32.25 211.5,31.5 211.5,29.75 212.75,28.5 213.25,28.5 IC56.21 | 225,74.5 224,74.5 IC21.10 | 225,77.25 225,74.5 | 225,77.25 224.5,77.75 224,77.75 IC21.15 | 225,77.25 225,81.5 224,81.5 IC21.21 223.75,81.5 223.25,81.5 223,81.75 223,83.25 | 223,83.25 223.75,83.25 IC21.24 | 225,74.5 225,70.75 224,70.75 IC21.4 223.75,70.75 223.5,70.75 223,70.25 223,68.75 223.75,68.75 IC21.1 224,68.75 225.25,67.5 225.25,26 222.25,26 221.25,27 221.25,28.25 | 223.75,116.5 222.75,116.5 IC3.10 | 223.75,119 223.75,116.5 | 223.75,119 223.25,119.5 222.75,119.5 IC3.15 | 223.75,119 223.75,123.25 222.75,123.25 IC3.21 222.5,123.5 222,123.5 221.75,123.75 221.75,125.25 | 221.75,125.25 222.5,125.25 IC3.24 | 223.75,116.5 223.75,112.75 222.75,112.75 IC3.4 222.5,112.5 222,112.5 221.75,112.25 221.75,110.75 222.5,110.75 IC3.1 222.75,110.75 222.75,83.5 223,83.25 | 211.25,123 211.25,126.25 211.5,126.5 221.75,126.5 221.75,125.25 | 131.25,129.25 132,129.25 IC16.21 | 131.25,130.75 131.25,129.25 | 131.25,130.75 131.5,131 132,131 IC16.24 | 121.5,121.75 122,122.25 122.25,122.25 IC16.39 | 121.5,121.75 120.75,121 120.75,118.5 122.25,118.5 IC16.45 | 121.5,121.75 121.5,125 | 121.5,125 121.5,125.25 122.25,125.25 IC16.34 | 121.25,129.25 120.75,129.25 120.75,125.75 121.5,125 | 121.25,129.25 122.25,129.25 IC16.28 | 131.25,130.75 124.75,130.75 123.75,131.75 121.25,131.75 121.25,129.25
  Top 0.127: 122.5,87.75 122.5,86.25 123.25,86.25 IC26.24 | 122.5,87.75 122.75,88 123.25,88 IC26.21 | 122.5,91.75 123.25,91.75 IC26.15 | 122.5,87.75 122.5,91.75 | 122.5,95 123.25,95 IC26.10 | 122.5,91.75 122.5,95 | 122.5,98.75 123.25,98.75 IC26.4 | 122.5,95 122.5,98.75 | 122.5,98.75 122.5,100.75 123.25,100.75 IC26.1 123.5,100.75 132,100.75 | 133.25,118.5 134,117.75 134,116.5 132.25,116.5 IC16.1 132,116.5 132,100.75 | 133.25,118.5 132.25,118.5 IC16.4 | 133.25,122.25 132.25,122.25 IC16.10 | 133.25,118.5 133.25,122.25 | 133.5,125.5 134,125.5 134,123 133.25,122.25 | 133.5,125.5 132.25,125.5 IC16.15 | 131.5,91 132.25,91.75 133,91.75 IC26.34 | 131.5,91 131,90.5 131,88 133,88 IC26.28 | 132.25,95 131.5,95 131.5,91 | 132.25,95 133,95 IC26.39 | 132.25,98.75 133,98.75 IC26.45 | 132.25,95 132.25,98.75 | 132,100.75 132,99 132.25,98.75 | v131,129.25 131.25,129.25 | 133.5,125.5 v133.5,127.5 | 157,120.5 157.5,121 IC19.7 | 157,120.5 157,114 159,112 165.5,112 165.5,111.25 U$7.9 | IC27.7 150.5,66.5 150,67 150,79.75 150.75,80.5 151.75,80.5 IC28.7 152,80.75 153.25,82 153.25,94.5 152.75,94.5 | 152.75,94.5 151.75,94.5 IC29.7 | 152.75,108.5 IC17.7 | 152.75,94.5 152.75,95.75 | 152.75,95.75 152.75,108.5 | 154.75,123.25 152.25,123.25 IC18.7 | 154.75,123.25 v154.75,120.5 154.75,110.5 152.75,108.5 | 154.75,123.25 v154.75,128.25 154.75,139 153.25,139 IC20.7 | v156.75,120.5 157,120.5 | 164.5,28.5 164.5,25 159.75,20.25 159.75,15 | 164.5,28.5 164.5,29.5 165,30 IC53.7 | 159.75,15 158.5,13.75 158,13.75 U$22.9 157.75,13.5 156,11.75 156,11.25 141.5,11.25 141.5,44.25 142.5,45.25 | 157.25,80.25 157.25,84 158.25,85 U$12.9 | 157.25,80.25 157.25,79.75 156.75,79.25 IC30.7
  Top 0.127: U$11.9 156.25,56.5 156.25,47.5 | 156.25,47.5 156.25,42.25 156.5,42 | 156.5,42 156.75,41.75 157.75,41.75 U$21.9 | 157.25,80.25 158.5,80.25 158.5,71.5 | 158.5,71.5 158.5,70.75 160.25,69 160.25,48.25 159.5,47.5 156.25,47.5 | 164.5,28.5 156.5,28.5 156.5,42 | 186.25,62.75 186.25,54.5 188,52.75 | 186.25,62.75 186.25,66.25 181,71.5 181,79 180.5,79.5 IC24.7 | 186.25,62.75 189.75,62.75 190,63 190,68.25 188.75,68.25 U$9.9 | 188.5,26.25 196.75,26.25 | 196.75,26.25 198,26.25 IC59.7 | 188.5,25 188.5,24.5 U$24.9 | 188.5,25 188.5,26.25 | 188.5,26.25 188.5,29.75 188,30.25 IC57.7 188,30.5 188,32.5 190.75,35.25 | 190.75,35.25 196.75,41.25 IC58.7 | 196.75,26.25 196.75,10.25 198.25,10.25 IC60.7 | 188,52.75 187,51.75 187,47 187.75,46.25 190.75,46.25 190.75,35.25 | 159.75,15 163.25,11.5 186.25,11.5 186.25,22.75 188.5,25 | 152.75,95.75 159.5,95.75 159.75,95.5 159.75,92.25 159.5,92 156.25,92 156.25,89 155.5,88.25 155.5,72.25 156.25,71.5 158.5,71.5 | 81.5,27 81.5,23.5 U$20.9 | 81.5,27 81.5,27.75 81.75,28 IC47.7 | 81.5,27 85.75,27 | 85.75,27 86.75,27 | 86.75,27 88,27 IC49.7 | 86.75,27 86.75,11.25 88.25,11.25 IC50.7 | 87.25,42.25 85.75,40.75 85.75,27 | 87.25,42.25 87.75,42.75 IC48.7 | v75,75.75 75,77.5 74.5,78 IC5.7 | U$2.9 82.25,93.75 85,93.75 85,82.75 81.25,79 81.25,74.25 82.5,73 82.5,69.75 v81.75,69 82,68.75 82,66.75 U$1.9 82,66.5 80.75,66.5 80.75,62.5 81,62.25 86.5,62.25 | 85.75,55.75 82,52 82,51 U$19.9 | 85.75,55.75 86.5,56.5 | 86.5,56.5 88.25,58.25 IC2.7 | 86.75,71.5 86.5,71.25 86.5,62.25 | 86.75,71.5 88.25,73 IC4.7 | 86.5,56.5 86.5,62.25 | 86.75,71.5 86.75,87.75 88,89 IC6.7 | 87.25,42.25 85.75,43.75 85.75,55.75
  Top 0.127: 145.25,30 144,30 IC54.7 | 145.25,30 145.25,43.75 144,45 IC52.7 143.75,45.25 142.5,45.25 | 145.25,30 145.5,29.75 145.5,12.5 144.25,12.5 IC55.7 | 129.75,45.25 129.75,46.25 130.25,46.75 130.5,46.75 IC51.24 130.75,46.75 130.75,49.5 145,49.5 145,48.25 142.75,48.25 142.5,48 142.5,45.25 | 129.75,45.25 129.75,44.75 130.5,44.75 IC51.21 | 129,33.5 129,32 130.5,32 IC51.1 | 129,33.5 129.5,34 130.5,34 IC51.4 | 129,38 129.75,38 130,37.75 130.5,37.75 IC51.10 | 129,33.5 129,34.75 | 129,34.75 129,38 | 129,41 130.5,41 IC51.15 | 129,38 129,41 | 129.75,45.25 128.75,45.25 128.75,41.25 129,41 | 106.75,64.25 107.5,64.25 IC1.24 | 106.75,65.75 106.75,64.25 | 106.75,65.75 107,66 107.5,66 IC1.21 | 106.75,69.75 107.5,69.75 IC1.15 | 106.75,65.75 106.75,69.75 | 106,73 107.5,73 IC1.10 | 106,73 106,70.5 106.75,69.75 | 106.75,76.75 106,76.75 106,73 | 106.75,76.75 107.5,76.75 IC1.4 | 106.75,76.75 106.75,78.75 107.5,78.75 IC1.1 | 119.25,72.25 119.25,66 117.5,66 IC1.28 117.25,66 116.5,66 116.5,59.25 119.25,56.5 119.25,53.25 | 119.25,72.25 118.5,73 117.5,73 IC1.39 117.25,73 116,73 115.75,72.75 115.75,69.75 117.25,69.75 IC1.34 | 119.25,72.25 119.25,76.75 117.5,76.75 IC1.45 | 109.5,19.5 109.5,16.25 108,16.25 IC46.45 | 109.5,19.5 109,20 108,20 IC46.39 | 109.5,23 108,23 IC46.34 | 109.5,19.5 109.5,20 | 109.5,20 109.5,23 | 109.5,23 110,23.5 110,27 108,27 IC46.28 | 118.5,15.75 118.5,14.25 117.75,14.25 IC46.1 | 118.5,15.75 118.25,16 117.75,16 IC46.4 | 118.5,20 117.75,20 IC46.10 | 118.5,15.75 118.5,20 | 118.5,23 117.75,23 IC46.15 | 118.5,20 118.5,23 | 118.5,27 117.75,27 IC46.21 | 118.5,23 118.5,27 | 118.5,28.75 117.75,28.75 IC46.24 | 118.5,27 118.5,28.75
  Top 0.127: v122.75,34.75 122.75,33.5 122,33.5 121.75,33.75 121.75,34 121,34 IC51.45 | 118.5,28.75 118.5,34.5 v118.75,34.75 118.75,37.75 119.25,37.75 | 119.25,37.75 120.75,37.75 IC51.39 | 120,41 119.25,41 119.25,37.75 | 120,41 120.75,41 IC51.34 | 120,44.75 120.75,44.75 IC51.28 | 120,41 120,44.75 | 119.25,53.25 120,52.5 120,44.75 | 119.25,53.25 118.5,54 X11.9 | v109.75,20 109.5,20 | 118.5,20 v118.75,20 | v106.5,64.25 106.75,64.25 | v128.75,34.75 129,34.75 | IC45.7 34.25,10.25 35.5,10.25 35.5,22.5 34.5,23.5 IC44.7 34.25,23.75 31.75,23.75 31.75,36.75 34.25,39.25 IC42.7 34.5,39.5 35.75,39.5 35.75,53 34.5,54.25 | 22.25,68.5 22.5,68.75 22.75,68.75 IC8.4 | 22.25,68.5 22,68.25 22,67 22.75,67 IC8.1 23,67 24.25,67 25.5,68.25 25.5,69 31.5,69 | 21.25,72.5 20.75,72.5 20.75,70 22.25,68.5 | 21.25,72.5 22.75,72.5 IC8.10 | 21.25,75.75 22.75,75.75 IC8.15 | 21.25,72.5 21.25,75.75 | 22,79.5 21.25,79.5 21.25,75.75 | 22,79.5 22.75,79.5 IC8.21 | 22,79.5 22,81.5 22.75,81.5 IC8.24 | 31.5,69 33.5,69 IC9.7 | 31.5,69 31.5,55 33.75,55 IC11.7 34,54.75 34.5,54.25 | 36.25,80 36.25,56 34.5,54.25 | 36.25,80 36.25,83 34.25,85 IC12.7 | IC8.34 13,75.75 12.25,75.75 12.25,73 12.75,72.5 13,72.5 IC8.39 13.25,72.5 15,72.5 15.25,72.25 15.25,68.75 13.25,68.75 IC8.45 13,68.75 12,68.75 | 12,68.75 11.25,69.5 11.25,79.5 13,79.5 IC8.28 | 22.5,28.25 22.75,28.5 23.25,28.5 IC41.34 | 22.5,28.25 22.25,28 22.25,24.75 23.25,24.75 IC41.28 | 21.5,31.75 23.25,31.75 IC41.39 | 21.5,31.75 21.5,29.25 22.5,28.25 | 21.5,35.5 23.25,35.5 IC41.45 | 21.5,31.75 21.5,35.5 | IC41.24 13.75,22.75 14.5,22.75 14.5,24.5 14.25,24.75 13.75,24.75 IC41.21 13.5,24.75 13,24.75 12.5,25.25
  Top 0.127: 12.5,28.5 13.5,28.5 IC41.15 | 12.5,25.25 12.5,28.5 | 12.5,31.75 11.75,31.75 11.75,29.25 12.5,28.5 | 12.5,31.75 13.5,31.75 IC41.10 | 12.5,31.75 12.5,34.5 | 12.5,34.5 12.5,35.5 13.5,35.5 IC41.4 13.75,35.5 21.5,35.5 | 12,37.5 11.5,37.5 11.5,35.5 12.5,34.5 | 12,37.5 13.5,37.5 IC41.1 | 12,37.5 12,68.75 | 101.75,121.75 102.25,121.25 102.25,118 101.25,118 IC101.28 | 101.75,121.75 101.25,121.75 IC101.34 101.75,121.75 | 101.75,121.75 103,123 103,125 101.25,125 IC101.39 101,125 100,125 99.5,125.5 99.5,128.75 | IC101.24 91.5,116 93.25,116 93.25,117 92.25,118 91.5,118 IC101.21 91.25,118 90.75,118 90.5,118.25 90.5,121.75 | 90.5,121.75 91.25,121.75 IC101.15 | 90.5,125 89.75,125 89.75,122.5 90.5,121.75 | 90.5,125 91.25,125 IC101.10 | 90.5,128.75 91.25,128.75 IC101.4 91.5,128.75 99.5,128.75 | 90.5,125 90.5,128.5 | 90.5,128.5 90.5,128.75 | 90.5,128.75 90.5,130.5 91.25,130.5 IC101.1 | 99.5,128.75 101,128.75 IC101.45 | 65.5,121.5 65.5,118 66.25,118 IC102.28 | 65.5,121.5 65.75,121.75 66.25,121.75 IC102.34 | 65.5,125 66.25,125 IC102.39 | 65.5,121.5 65.5,125 | 65.5,125 64.75,125.75 64.75,128.75 v65,128.75 66.25,128.75 IC102.45 | 56,116 55.75,116 55.75,117.5 | 56,116 56.5,116 IC102.24 56,116 | 55.75,117.5 56.25,118 56.5,118 IC102.21 | 55.75,121.75 56.5,121.75 IC102.15 | 55.75,117.5 55.75,121.75 | 55.75,125 56.5,125 IC102.10 | 55.75,121.75 55.75,125 | 55.75,128.75 56.5,128.75 IC102.4 56.75,128.75 v58,128.75 | 55.75,125 55.75,128.75 | 55.75,128.75 55.75,130.5 56.5,130.5 IC102.1 | 55.25,68.25 51.5,64.5 51.5,57 | 55.25,68.25 55.75,68.75 55.75,71.25 56.25,71.75 IC13.7 56.25,72 v56.25,75.25 57,76 57,79 56,80 56,116
  Top 0.127: 51.5,57 50.75,56.25 50.25,56.25 U$3.9 | 51.5,45.75 49,45.75 48.25,45 48.25,40 50,40 U$17.9 | 51.5,57 51.5,45.75 | v52,79.5 52,82.25 51,83.25 U$4.9 | 51.5,45.75 51.75,45.5 51.75,43.75 57.25,38.25 57.25,27.75 56.75,27.25 IC43.7 56.5,27 56,26.5 56,23.5 51.5,19 51.5,13.75 50.5,12.75 50,12.75 U$18.9 49.75,12.5 49.75,9 22,9 11.5,19.5 11.5,24.25 12.5,25.25 | v68.25,128.5 90.5,128.5 | v38.25,80 36.25,80 | 55.25,68.25 v55,68.25
  Bottom 0.127: v202.5,95.5 v191.75,95.5 | v131,129.25 132.75,127.5 v133.5,127.5 134.25,128.25 v154.75,128.25 | v154.75,120.5 v156.75,120.5 | v81.75,69 77.75,73 | 77.75,73 v75,75.75 | v118.75,34.75 v122.75,34.75 v128.75,34.75 | v118.75,20 v109.75,20 | X11.9 118.25,54.25 117.25,54.25 117.25,56.5 116.5,57.25 113.5,57.25 v106.5,64.25 106,64.75 75.25,64.75 75.25,68.25 | 77.75,73 75.25,70.5 75.25,68.25 | v58,128.75 v65,128.75 68,128.75 v68.25,128.5 | v56.25,75.25 v52,79.5 51.5,80 v38.25,80 | v55,68.25 75.25,68.25
N$1  (via drill 0.25)
  Top 0.127: 115.25,29.75 115.25,47.75 109.25,53.75 109.25,55 110.25,56 X11.2 | 115.25,29.75 115.25,28.25 117.5,28.25 IC46.23 | v93,16 94.5,16 IC50.12 | v110.75,16.25 114.25,19.75 114.25,28.75 115.25,29.75
  Bottom 0.127: v93,16 93.25,16.25 v110.75,16.25
N$2  (via drill 0.25)
  Top 0.127: v112.75,78 107.75,78 IC1.2 | v116.25,77.75 117.25,77.75 117.25,77.5 IC1.46 | v87.25,71.25 87.25,67 88.25,66 IC2.1
  Bottom 0.127: v116.25,77.75 113,77.75 v112.75,78 110.5,78 108.75,76.25 100.5,76.25 100,76.75 83.75,76.75 83.75,74.75 v87.25,71.25
N$3  (via drill 0.25)
  Top 0.127: v109.5,76.25 108.5,77.25 108.5,77.5 107.75,77.5 IC1.3 | v115.75,76.25 117.25,76.25 IC1.44 | v91.25,76.25 91.25,62.25 88.5,62.25 IC2.4
  Bottom 0.127: v115.75,76.25 v109.5,76.25 109.25,76 91.5,76 v91.25,76.25
N$4  (via drill 0.25)
  Top 0.127: v109,75.5 109,76.25 107.75,76.25 IC1.5 | v116.25,75.5 117.25,75.5 IC1.43 | v98.25,74.75 98.25,59.75 94.75,59.75 IC2.9
  Bottom 0.127: v116.25,75.5 v109,75.5 108.75,75.75 99.25,75.75 v98.25,74.75
N$5  (via drill 0.25)
  Top 0.127: v106.5,75.25 106.5,75.5 107.5,75.5 IC1.6 | v118.75,75 118,74.25 117.5,74.25 IC1.41 | v93,63.5 94.5,63.5 IC2.12 | v99.25,64.25 102,67 v102,74.75
  Bottom 0.127: v118.75,75 106.75,75 v106.5,75.25 102.5,75.25 v102,74.75 | v93,63.5 93.75,64.25 v99.25,64.25
N$6  (via drill 0.25)
  Top 0.127: v106.5,74.25 107.5,74.25 IC1.8 | v116.25,74 116.75,73.5 117.25,73.5 117.25,73.75 IC1.40 | v90.75,74.25 90.75,80.75 88.5,80.75 IC4.1
  Bottom 0.127: v116.25,74 106.75,74 v106.5,74.25 v90.75,74.25
N$7  (via drill 0.25)
  Top 0.127: v109.75,72.5 109.75,73.75 107.75,73.75 IC1.9 | v116.25,72.5 117.25,72.5 IC1.38 | IC4.4 90,77 v90,72.5
  Bottom 0.127: v116.25,72.5 v109.75,72.5 v90,72.5
N$8  (via drill 0.25)
  Top 0.127: v109,72 109,72.25 107.75,72.25 IC1.11 | v118.75,72 117.5,72 IC1.37 | v93,72 93,74.25 94.5,74.25 IC4.9
  Bottom 0.127: v118.75,72 v109,72 v93,72
N$9  (via drill 0.25)
  Top 0.127: IC1.12 108.5,71.75 v109.25,71 | v118.75,71 117.5,71 IC1.36 | v92.25,71 92.25,78.25 94.5,78.25 IC4.12
  Bottom 0.127: v118.75,71 v109.25,71 v92.25,71
N$10  (via drill 0.25)
  Top 0.127: v106.5,71.5 106.5,71.25 107.5,71.25 IC1.13 | v116.25,71.5 116.5,71.25 116.5,71 117,70.5 117.25,70.5 IC1.35 | v85.25,74.5 85.25,74.75 82,78 IC5.1
  Bottom 0.127: v116.25,71.5 v106.5,71.5 88.25,71.5 v85.25,74.5
N$11  (via drill 0.25)
  Top 0.127: v109.75,70.25 109.75,70.5 107.75,70.5 IC1.14 | v118.75,70 118,69.25 117.5,69.25 IC1.33 | v78.25,75.5 78.25,78 IC5.4
  Bottom 0.127: v118.75,70 110,70 v109.75,70.25 109.5,70.25 108,68.75 85,68.75 v78.25,75.5
N$12  (via drill 0.25)
  Top 0.127: v109.25,69.25 107.75,69.25 IC1.16 | v116.25,69.25 117,68.5 117.25,68.5 IC1.32 | v75.75,70.25 75.75,71.75 IC5.9
  Bottom 0.127: v109.25,69.25 v116.25,69.25 119.25,69.25 119.25,67 119,66.75 112.5,66.75 112,67.25 78.75,67.25 v75.75,70.25
N$13  (via drill 0.25)
  Top 0.127: v109.75,68.5 107.75,68.5 IC1.17 | v118.75,68.25 118.5,68 118.5,67.75 118,67.25 117.5,67.25 IC1.30 | v80,68.5 80,71.25 79.5,71.75 IC5.12
  Bottom 0.127: v118.75,68.25 110,68.25 v109.75,68.5 v80,68.5
N$14  (via drill 0.25)
  Top 0.127: v112.75,67.25 107.75,67.25 IC1.19 | v118.75,67.25 118.25,66.75 117.5,66.75 IC1.29 | v85.75,68 85.75,96.5 88,96.5 IC6.1
  Bottom 0.127: v118.75,67.25 v112.75,67.25 112.5,67.5 86.25,67.5 v85.75,68
N$15  (via drill 0.25)
  Top 0.127: v111.75,66.75 107.75,66.75 IC1.20 | v119.25,65.5 117.5,65.5 IC1.27 | v95.5,66.75 91.75,70.5 91.75,92.75 88.25,92.75 IC6.4
  Bottom 0.127: v119.25,65.5 113,65.5 v111.75,66.75 v95.5,66.75
N$16  (via drill 0.25)
  Top 0.127: v109.75,65.25 107.75,65.25 IC1.22 | v118.75,64.75 117.5,64.75 IC1.26 | v95.75,81.75 95.75,90.25 94.5,90.25 IC6.9 | v100.75,76.75 104.5,73 v104.5,66.25
  Bottom 0.127: v118.75,64.75 110.25,64.75 v109.75,65.25 105.5,65.25 v104.5,66.25 | v100.75,76.75 v95.75,81.75
N$17
  Top 0.127: U$1.18 74.75,56.25 67,56.25 67,55.25 X2.1
N$19  (via drill 0.25)
  Top 0.127: v90,63.5 88.5,63.5 IC2.3 | v86,61.75 84.25,60 84.25,57.5 83.25,56.5 82.25,56.5 U$1.1
  Bottom 0.127: v90,63.5 88.25,61.75 v86,61.75
N$20  (via drill 0.25)
  Top 0.127: v87,58.25 87,59.5 88.25,59.5 IC2.6 | v83.75,57.75 82.25,57.75 U$1.2
  Bottom 0.127: v87,58.25 86.5,57.75 v83.75,57.75
N$21  (via drill 0.25)
  Top 0.127: v90.75,58.5 94.5,58.5 IC2.8 | v83.75,58.75 82.25,58.75 U$1.3
  Bottom 0.127: v90.75,58.5 90.5,58.75 v83.75,58.75
N$22  (via drill 0.25)
  Top 0.127: v92.75,62 94.5,62 IC2.11 | v83.75,60.25 82.25,60.25 U$1.4
  Bottom 0.127: v92.75,62 91,60.25 v83.75,60.25
N$23  (via drill 0.25)
  Top 0.127: v90.5,62.75 90.5,72.75 90.25,73 90.25,78.25 88.5,78.25 IC4.3 | v83.75,61.25 82.25,61.25 82.25,61.5 U$1.5
  Bottom 0.127: v90.5,62.75 89,61.25 v83.75,61.25
N$24  (via drill 0.25)
  Top 0.127: IC4.11 92.75,77 v92.75,75.25 | v84.25,75 83.5,74.25 83.5,66.25 82.75,65.5 82.25,65.5 U$1.8
  Bottom 0.127: v92.75,75.25 92.5,75 v84.25,75
N$25  (via drill 0.25)
  Top 0.127: v93.5,70.5 93.5,72 94.5,73 IC4.8 | v85.25,69.25 83.75,67.75 83.75,65.25 82.75,64.25 82.25,64.25 U$1.7
  Bottom 0.127: v93.5,70.5 92.25,69.25 v85.25,69.25
N$26
  Top 0.127: IC4.6 88.25,74.5 87,74.5 87,86.25 89.5,88.75 89.5,89.5 89.25,89.75 86.25,89.75 86.25,66.5 82.75,63 82.25,63 U$1.6
N$27
  Top 0.127: IC5.3 79.5,78.25 80,78.75 80,81.5 82,83.5 U$2.1
N$28  (via drill 0.25)
  Top 0.127: v76,79.75 76,78.5 75.75,78.25 IC5.6 | v80.5,83.75 81.5,84.75 82,84.75 U$2.2
  Bottom 0.127: v76,79.75 80,83.75 v80.5,83.75
N$29  (via drill 0.25)
  Top 0.127: v73.5,79 73.5,72.75 74.25,72 IC5.8 | v80.5,85 81.5,86 82,86 U$2.3
  Bottom 0.127: v73.5,79 79.5,85 v80.5,85
N$30  (via drill 0.25)
  Top 0.127: v92.25,92.75 94.25,92.75 IC6.11 | v83.75,92.5 82.25,92.5 U$2.8
  Bottom 0.127: v92.25,92.75 92,92.5 v83.75,92.5
N$31  (via drill 0.25)
  Top 0.127: v92.25,89.25 94.25,89.25 IC6.8 | v83.75,91.25 82.25,91.25 U$2.7
  Bottom 0.127: v92.25,89.25 90.25,91.25 v83.75,91.25
N$32  (via drill 0.25)
  Top 0.127: v86.25,90.25 88,90.25 IC6.6 | v83.75,90.25 82.25,90.25 U$2.6
  Bottom 0.127: v83.75,90.25 v86.25,90.25
N$33  (via drill 0.25)
  Top 0.127: v89.75,94 88.25,94 IC6.3 | v84.5,93 84.25,92.75 84.25,90 83,88.75 82.25,88.75 U$2.5
  Bottom 0.127: v89.75,94 88.75,93 v84.5,93
N$34
  Top 0.127: IC5.11 78.25,72 78.75,72.5 78.75,84.5 81.5,87.25 82,87.25 U$2.4
N$35  (via drill 0.25)
  Top 0.127: 100,130 91.5,130 IC101.2 | 100,130 100,129.75 100.25,129.5 101,129.5 IC101.46 | 203.75,73.5 203.75,70.75 202.5,70.75 IC23.2 | 203.75,73.5 203,74.25 202.5,74.25 IC23.5 | 197.5,70.75 196.25,70.75 IC23.13 | 197.5,73.75 197.5,70.75 | 197.5,73.75 197,74.25 196.25,74.25 IC23.10 | 198,56.5 201.75,56.5 IC22.2 202,56.25 203.25,57.5 203.25,60.25 202,60.25 IC22.5 | 198,56.5 IC22.13 195.5,56.25 194.5,57.25 194.5,60.25 195.5,60.25 IC22.10 | 197.5,70.75 198,70.25 198,56.5 | v204,73.75 203.75,73.5 | 197.5,73.75 v197.75,74 | 100,130 100,131.25 113.75,131.25 v113.75,84.75
  Bottom 0.127: v204,73.75 203.75,74 v197.75,74 197.5,74.25 124.25,74.25 v113.75,84.75
N$36  (via drill 0.25)
  Top 0.127: v93,129.25 91.5,129.25 IC101.3 | v102.5,128.25 101.25,128.25 IC101.44 | IC24.5 183,79.5 183,73.5 IC24.10 183,73.25 183.5,72.75 183.5,72.5 183.75,72.25 186.5,72.25 186.5,73.25 IC24.13 186.75,73.5 186.75,79.5 IC24.2 186.75,79.75 186.75,80.25 190.25,83.75 190.25,85.25 192.25,85.25 | IC25.2 202.75,85.5 v204.25,85.5 204.25,88.5 203.75,89 202.75,89 IC25.5 | 197.75,85.5 196.5,85.5 IC25.13 196.25,85.25 192.25,85.25 | 197.75,85.5 197.75,88.25 197,89 196.5,89 IC25.10 | 197.75,85.5 v198,85.5 | v191.25,121.75 192.25,120.75 192.25,85.25
  Bottom 0.127: v93,129.25 93.75,128.5 102.25,128.5 v102.5,128.25 103.75,127 120.5,127 120.75,126.75 120.75,124 157.75,124 158.75,123 171.5,123 171.75,123.25 187,123.25 188.5,121.75 v191.25,121.75 | v198,85.5 v204.25,85.5
N$39  (via drill 0.25)
  Top 0.127: v14.5,67.75 14.5,68 13.25,68 IC8.46 | IC8.2 23,67.75 v24.25,67.75 25.25,68.75 25.25,72.25 34.5,72.25 34.75,72.5 34.75,73.5 32,73.5 31.5,74 31.5,76.75 33.5,76.75 IC9.1
  Bottom 0.127: v24.25,67.75 v14.5,67.75
N$40  (via drill 0.25)
  Top 0.127: v12,69.5 13,69.5 IC8.44 | IC8.3 23,68.25 23.75,68.25 24,68.5 24,69 v24.25,69.25 25,70 25,72.75 33.5,72.75 IC9.4
  Bottom 0.127: v12,69.5 12.25,69.25 v24.25,69.25
N$41  (via drill 0.25)
  Top 0.127: v14.75,70 13.25,70 IC8.43 | v21.75,69.75 22.25,69.25 22.75,69.25 22.75,69.5 IC8.5 | v38.25,69.75 38.25,70.25 39.5,70.25 IC9.9
  Bottom 0.127: v14.75,70 15,69.75 v21.75,69.75 v38.25,69.75
N$42  (via drill 0.25)
  Top 0.127: v14.75,71 14.75,71.25 13.25,71.25 IC8.41 | v24.25,70.25 23,70.25 23,70 IC8.6 | IC9.12 37.5,74.25 v37.5,73.75
  Bottom 0.127: v14.75,71 15.5,70.25 v24.25,70.25 34,70.25 v37.5,73.75
N$43  (via drill 0.25)
  Top 0.127: v14.75,72 13.25,72 IC8.40 | v21.25,71.25 22.75,71.25 IC8.8 | v32,62.5 33.75,62.5 IC11.1
  Bottom 0.127: v21.25,71.25 15.5,71.25 v14.75,72 11.5,72 11.5,69.25 13.5,67.25 27.25,67.25 v32,62.5
N$44  (via drill 0.25)
  Top 0.127: v15.25,73 15.25,73.25 13.25,73.25 IC8.38 | v21.75,72 22.75,72 IC8.9 | v35.75,72.75 35.75,56.75 32.75,56.75 32.5,57 32.5,58.5 33.75,58.5 IC11.4
  Bottom 0.127: v15.25,73 16.25,72 v21.75,72 35,72 v35.75,72.75
N$45  (via drill 0.25)
  Top 0.127: v14.75,73.75 13.25,73.75 IC8.37 | v21.75,73.75 22.25,73.25 22.75,73.25 IC8.11 | v38.5,55.5 38.5,56 39.75,56 IC11.9
  Bottom 0.127: v21.75,73.75 v14.75,73.75 11.25,73.75 11.25,69 24.5,55.75 38.25,55.75 v38.5,55.5
N$46  (via drill 0.25)
  Top 0.127: v15.25,74.75 15.25,74.5 13.25,74.5 IC8.36 | v21.75,74.75 22,74.5 22,74.25 22.25,74 22.75,74 IC8.12 | v42,74.75 42,60 40,60 IC11.12
  Bottom 0.127: v15.25,74.75 v21.75,74.75 v42,74.75
N$47  (via drill 0.25)
  Top 0.127: v14.5,75.25 13.25,75.25 IC8.35 | v24.25,74.25 23,74.25 23,74.5 IC8.13 | v30.75,74.25 30.75,92.5 34,92.5 IC12.1
  Bottom 0.127: v14.5,75.25 14.5,74.25 v24.25,74.25 v30.75,74.25
N$48  (via drill 0.25)
  Top 0.127: v24.25,75.25 23,75.25 IC8.14 | v14.5,76.25 13.25,76.25 IC8.33 | v35.25,77 35.25,79 32.75,81.5 32.75,88.75 34,88.75 IC12.4
  Bottom 0.127: 23.5,76 23.25,76.25 v14.5,76.25 | 23.5,76 v24.25,75.25 | v35.25,77 34.25,76 23.5,76
N$49  (via drill 0.25)
  Top 0.127: v15.25,77 13.25,77 IC8.32 | v21.75,77 22.25,76.5 22.75,76.5 IC8.16 | v39.25,78.5 39,78.75 39,86.25 40,86.25 IC12.9
  Bottom 0.127: v15.25,77 v21.75,77 24.5,77 25,77.5 38.25,77.5 v39.25,78.5
N$50  (via drill 0.25)
  Top 0.127: v14.75,78.25 13.25,78.25 IC8.30 | v21.75,78 22,77.75 22,77.5 22.5,77 22.75,77 IC8.17 | v30,94.5 41.75,94.5 42,94.25 42,90.25 40.25,90.25 IC12.12
  Bottom 0.127: v21.75,78 15,78 v14.75,78.25 14.75,79.25 v30,94.5
N$51  (via drill 0.25)
  Top 0.127: v15.25,79 13.25,79 IC8.29 | v21.75,79 22.5,78.25 22.75,78.25 IC8.19 | v47.5,76 47.5,73 48.5,72 IC13.1
  Bottom 0.127: v15.25,79 v21.75,79 44.5,79 v47.5,76
N$52  (via drill 0.25)
  Top 0.127: 25.25,80.5 25.25,82.25 12.25,82.25 12,82 12,80.25 13,80.25 IC8.27 | 25.25,80.5 23.75,79 23,79 IC8.20 | v51.75,73.25 51.75,72.5 52.25,72 IC13.4 | 25.25,80.5 v30.25,75.5
  Bottom 0.127: v51.75,73.25 49.5,75.5 v30.25,75.5
N$53  (via drill 0.25)
  Top 0.127: IC8.26 13,80.75 12.25,80.75 12.25,81.75 12.5,82 24.75,82 v24.75,81.5 24.75,80.5 24.5,80.25 23,80.25 IC8.22 | v54.75,79.5 54.75,78.25 55,78 IC13.9
  Bottom 0.127: v54.75,79.5 53.25,81 25.25,81 v24.75,81.5
N$54  (via drill 0.25)
  Top 0.127: v24.25,80.75 23,80.75 IC8.23 | v51,79.5 51,78 IC13.12 | v119.25,36.75 119.25,32.75 120.75,32.75 IC51.47 | v63.25,52 58.5,56.75 55.25,56.75 55.25,67.75 57,69.5 v57,73.5
  Bottom 0.127: v24.25,80.75 25.5,79.5 v51,79.5 v57,73.5 | v119.25,36.75 104,52 v63.25,52
N$56  (via drill 0.25)
  Top 0.127: v32,74.25 IC9.3 | v49.5,69.25 50,68.75 50,66.5 U$3.1
  Bottom 0.127: v32,74.25 44.5,74.25 v49.5,69.25
N$57  (via drill 0.25)
  Top 0.127: v35,69.25 35,70.25 33.75,70.25 IC9.6 | v47.25,69.25 48.75,67.75 48.75,66 49.5,65.25 50,65.25 U$3.2
  Bottom 0.127: v47.25,69.25 v35,69.25
N$58  (via drill 0.25)
  Top 0.127: v41.25,67.5 39.75,69 IC9.8 | v48.5,65 49.5,64 50,64 U$3.3
  Bottom 0.127: v41.25,67.5 43.75,65 v48.5,65
N$59  (via drill 0.25)
  Top 0.127: v37.75,68.25 37.75,72.75 39.5,72.75 IC9.11 | v48.5,63.75 49.5,62.75 50,62.75 U$3.4
  Bottom 0.127: v37.75,68.25 42.25,63.75 v48.5,63.75
N$60  (via drill 0.25)
  Top 0.127: v32.25,60 33.75,60 IC11.3 | v48.5,60 49.75,61.25 U$3.5
  Bottom 0.127: v48.5,60 v32.25,60
N$61  (via drill 0.25)
  Top 0.127: v42,58.5 40,58.5 IC11.11 | v48.5,57.5 50,57.5 U$3.8
  Bottom 0.127: v42,58.5 43,57.5 v48.5,57.5
N$62  (via drill 0.25)
  Top 0.127: v42,55 40,55 IC11.8 | v47.25,57 48.75,58.5 50,58.5 U$3.7
  Bottom 0.127: v42,55 44,57 v47.25,57
N$63  (via drill 0.25)
  Top 0.127: v35.75,56.25 34,56.25 IC11.6 | v48.5,59 49.25,59.75 50,59.75 U$3.6
  Bottom 0.127: v35.75,56.25 38.5,59 v48.5,59
N$64  (via drill 0.25)
  Top 0.127: v32.5,90.25 34,90.25 IC12.3 | v48.75,92 50.25,93.5 50.75,93.5 U$4.1
  Bottom 0.127: v32.5,90.25 34.25,92 v48.75,92
N$65  (via drill 0.25)
  Top 0.127: v37.75,86.5 34.25,86.5 IC12.6 | v49.25,91 50.75,92.5 U$4.2
  Bottom 0.127: v37.75,86.5 42.25,91 v49.25,91
N$66  (via drill 0.25)
  Top 0.127: v42,85.25 40.25,85.25 IC12.8 | v48,88.5 50.75,91.25 U$4.3
  Bottom 0.127: v42,85.25 45.25,88.5 v48,88.5
N$67
  Top 0.127: IC13.11 52.5,78 52.5,83.75 51.75,84.5 51,84.5 U$4.8
N$68
  Top 0.127: IC13.8 56.25,78 55.75,78.5 55.75,84.25 52.25,87.75 49.75,87.75 49.5,87.5 49.5,87 50.75,85.75 U$4.7
N$69
  Top 0.127: IC13.6 55,72 54.25,72.75 54.25,84.5 51.75,87 51,87 U$4.6
N$70
  Top 0.127: IC13.3 51,72 50.5,72.5 50.5,82 49.5,83 49.5,86.5 49.25,86.75 49.25,87.75 50,88.5 50.75,88.5 U$4.5
N$71  (via drill 0.25)
  Top 0.127: v42,88.75 40.25,88.75 IC12.11 | v49.25,89 50.75,89 50.75,89.75 U$4.4
  Bottom 0.127: v42,88.75 42.25,89 v49.25,89
N$72  (via drill 0.25)
  Top 0.127: IC8.47 14,67.5 14.25,67.25 15.25,67.25 v15.25,68.25 | v92.75,94.5 94.25,94.5 94.25,94.25 IC6.12 | v105.75,81.5 105.75,63.75 108.5,63.75 108.75,64 108.75,64.25 108.5,64.5 108.5,64.75 107.75,64.75 IC1.23
  Bottom 0.127: v15.25,68.25 15.75,68.75 55.25,68.75 64.75,78.25 68.5,78.25 84.75,94.5 v92.75,94.5 v105.75,81.5
N$75
  Top 0.127: U$1.17 74.75,57.5 67,57.5 67,57.25 X2.3
N$76
  Top 0.127: U$1.16 74.75,59 67,59 X2.5
N$77
  Top 0.127: U$1.15 74.75,60.25 67,60.25 67,61 X2.7
N$78
  Top 0.127: U$1.14 68,61.5 68,61.75 67,62.75 67,63 X2.9
N$79
  Top 0.127: U$1.13 74.75,63 68.25,63 68.25,63.75 67,65 X2.11
N$80
  Top 0.127: U$1.12 75,64 76.25,64 76.25,62.25 68,62.25 68,63.5 67.25,64.25 66,64.25 66,66.25 66.75,67 X2.13
N$81
  Top 0.127: U$1.11 74.75,65.5 68,65.5 68,68 67,69 X2.15
N$82  (via drill 0.25)
  Top 0.127: v74.75,79.5 74.75,83.5 U$2.18
  Bottom 0.127: v74.75,79.5 67,71.75 67,71.25 X2.17
N$83  (via drill 0.25)
  Top 0.127: v76.25,82.5 76.25,84.75 75,84.75 U$2.17
  Bottom 0.127: v76.25,82.5 67,73.25 X2.19
N$84
  Top 0.127: U$2.16 75,86.25 76.5,86.25 76.5,94.5 76.25,94.75 66,94.75 66,76 66.75,75.25 X2.21
N$85  (via drill 0.25)
  Top 0.127: v73.5,82.5 73.5,87.25 74.75,87.25 U$2.15
  Bottom 0.127: v73.5,82.5 68.25,77.25 67,77.25 X2.23
N$86
  Top 0.127: U$2.14 75,88.75 76.25,88.75 76.25,94.25 76,94.5 68,94.5 68,80.25 67,79.25 X2.25
N$87  (via drill 0.25)
  Top 0.127: v73,87.25 73,90 74.75,90 U$2.13
  Bottom 0.127: v73,87.25 67,81.25 X2.27
N$88  (via drill 0.25)
  Top 0.127: v72.5,88.75 72.5,91.25 74.75,91.25 U$2.12
  Bottom 0.127: v72.5,88.75 67,83.25 X2.29
N$89  (via drill 0.25)
  Top 0.127: v73.25,91.75 73.25,92.5 74.75,92.5 U$2.11
  Bottom 0.127: v73.25,91.75 66.75,85.25 X2.31
N$90  (via drill 0.25)
  Top 0.127: v59.75,85 59.75,84.75 58.25,84.75 U$4.11